# EAGLE board PokeRoyaleBetyPCB (EAGLE 8.6.3)
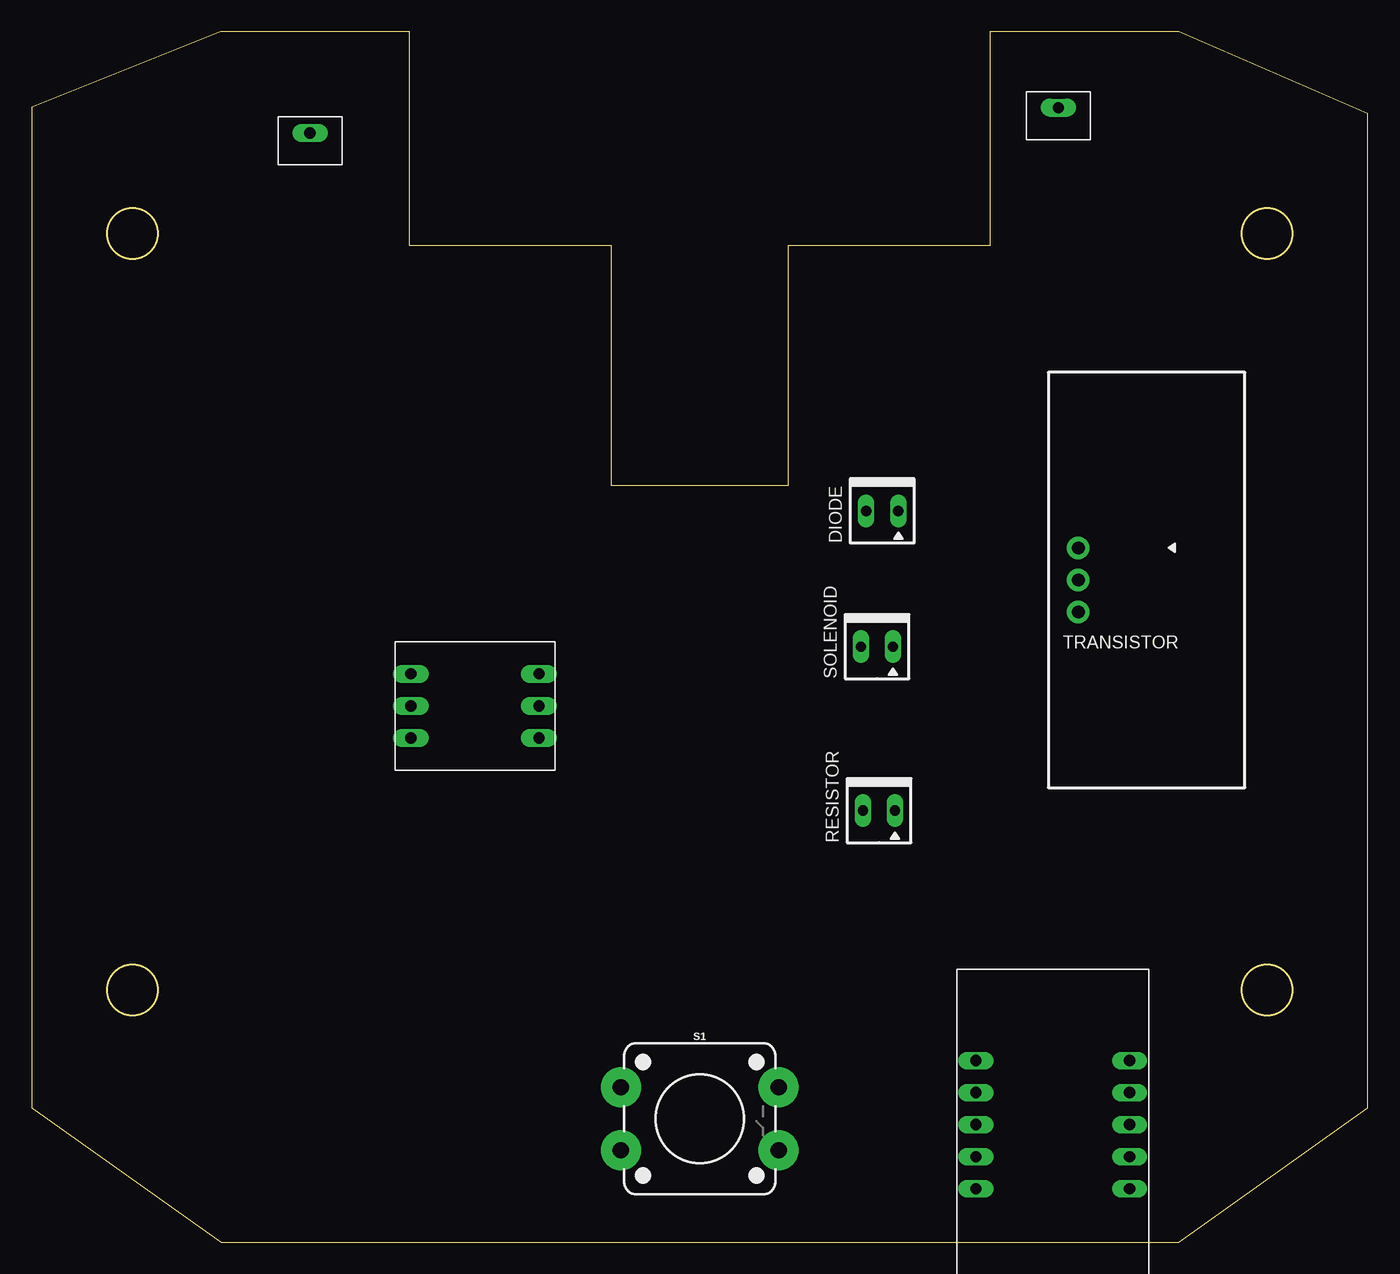
[diagram p0: board, top side]
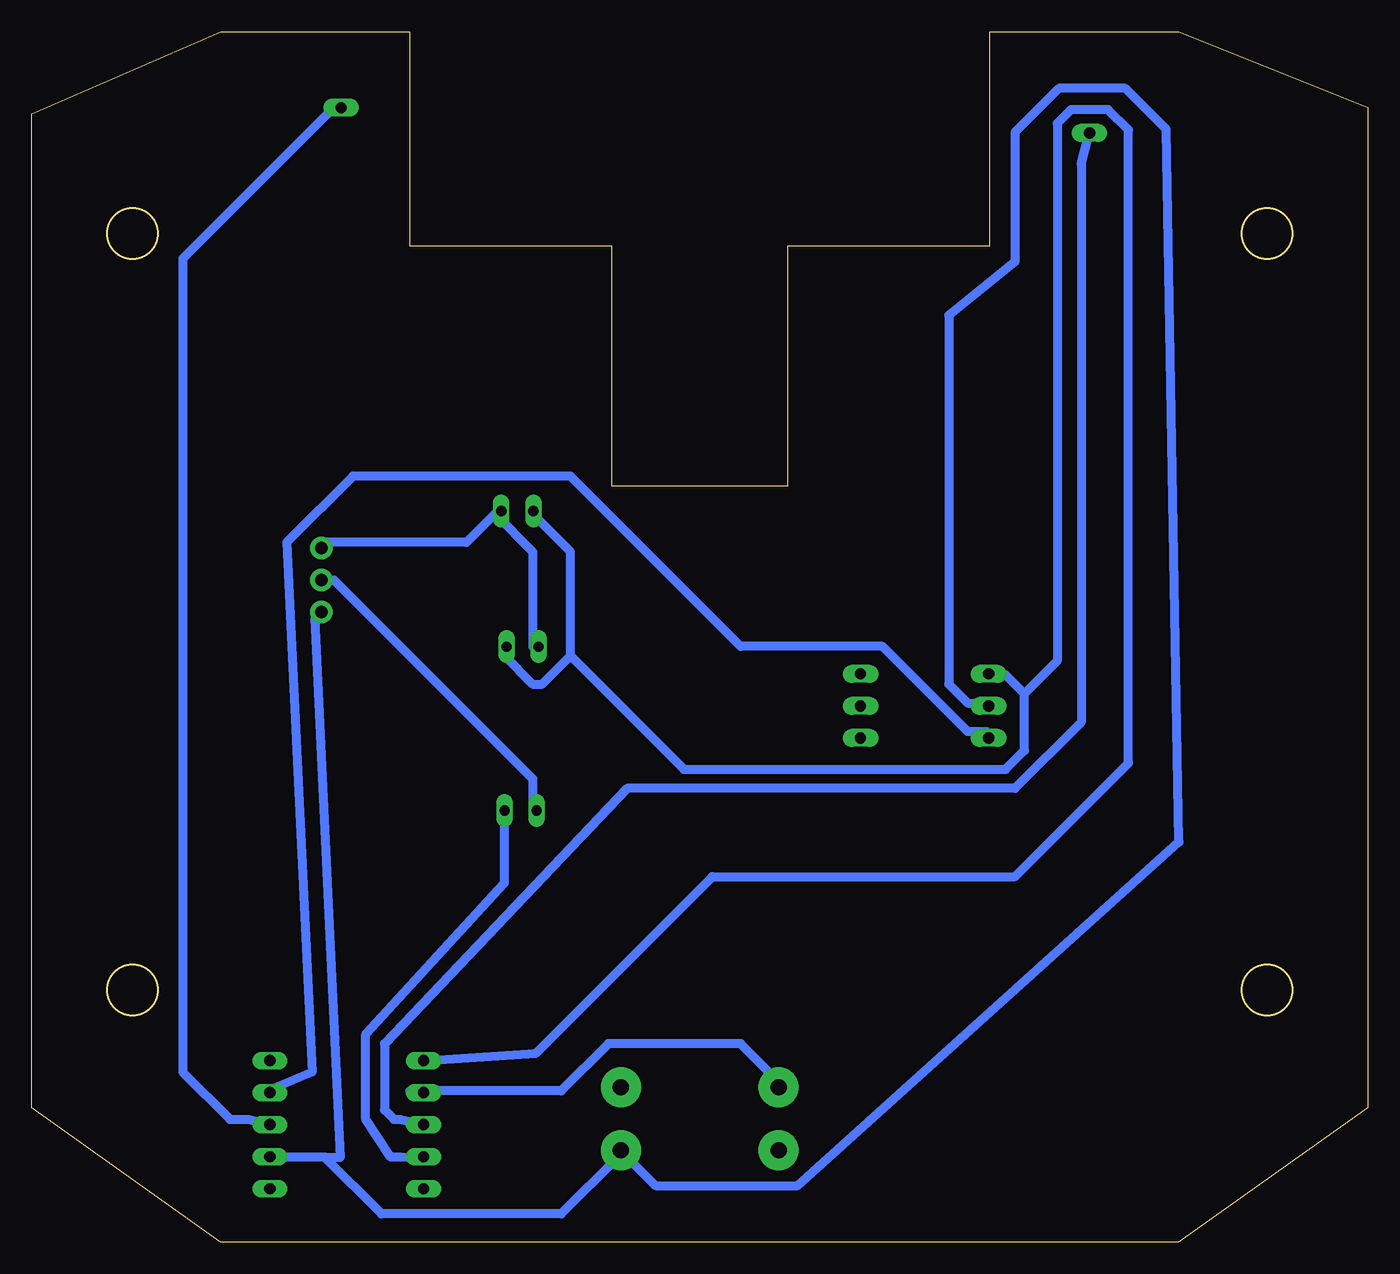
[diagram p1: board, bottom side, seen from below]

Size 106 x 96 mm. Coordinates in mm from the lower left corner, seen from the top.
Outline: 0,10.69 15.05,0 91,0 106,10.69 106,89.5 91,96 76,96 76,79 60,79 60,60 46,60 46,79 30,79 30,96 15,96 0,90 0,10.69
Outline: circle at 8,80 radius 2
Outline: circle at 8,20 radius 2
Outline: circle at 98,80 radius 2
Outline: circle at 98,20 radius 2
Copper layers (1*16): Top 0.035mm / dielectric 1.5mm / Bottom 0.035mm
Design rules "default *": minimum track width 0.7mm, minimum drill 0.8mm, track to track 0.8mm, track to pad 0.8mm, pad to pad 0.8mm, via to via 0.8mm, smd to smd 0.8mm, copper to edge 40mil, drill to drill 6mil, minimum pad ring 10mil, minimum via ring 8mil, stop-mask expansion 4mil, vias tented up to drill 0mil, thermal gap 10mil

## Footprints (pad centres in the part's own frame; a part is rotated, then mirrored left to right if it is on the bottom)
LCW-102-XX-X-S = drill 0.813 long: 1 1.27,0; 2 -1.27,0
TACTILE_SWITCH_PTH_12MM = drill 1.3 pad 3.175: 1 6.25,-2.5; 2 -6.25,-2.5; 3 6.25,2.5; 4 -6.25,2.5
LCW-103-XX-X-S = drill 1 pad 1.778: 1 2.54,5.415; 2 0,5.415; 3 -2.54,5.415
NEOPIXEL = drill 0.889 pad 1.422 long: + -3.81,2.54; +1 6.35,2.54; G -3.81,0; G1 6.35,0; IN -3.81,-2.54; O 6.35,-2.54
TRINKET = drill 0.889 long: 5V 6.096,-6.096; #0 6.096,1.524; #1 6.096,-1.016; #2 6.096,-3.556; #3 -6.096,-3.556; #4 -6.096,-1.016; BAT -6.096,4.064; GND -6.096,1.524; RST -6.096,-6.096; USB 6.096,4.064
COMMS = drill 0.9 long: P$1 0,0

## Placement (x,y rotation side)
DIODE  LCW-102-XX-X-S  [LCW-102-XX-X-S]  67.47,57.99 0 top
RESISTOR  LCW-102-XX-X-S  [LCW-102-XX-X-S]  67.22,34.23 0 top
S1  [TACTILE_SWITCH_PTH_12MM]  53,9.8 0 top
SOLENOID  LCW-102-XX-X-S  [LCW-102-XX-X-S]  67.06,47.23 0 top
TRANSISTOR  LCW-103-XX-X-S  [LCW-103-XX-X-S]  88.44,52.52 90 top
U$1  NEOPIXEL  [NEOPIXEL]  33.9,42.53 0 top
U$2  TRINKET  [TRINKET]  81,8.32 180 top
U$3  COMMS  [COMMS]  81.44,89.96 0 top
U$4  COMMS  [COMMS]  22.09,87.96 0 top

## Library data of the parts
DIODE RESISTOR SOLENOID TRANSISTOR = altered con-samtec
S1 = altered SparkFun-Switches
U$1-U$4 = adafruitComponents

## Nets
N$1: S1.4 U$2.#2
N$2: S1.1 TRANSISTOR.3 U$1.G U$2.GND
N$4: DIODE.1 SOLENOID.2 TRANSISTOR.1
N$5: U$1.IN U$2.#3
N$6: U$2.#4 U$3.P$1
N$7: U$2.#1 U$4.P$1
N$8: DIODE.2 SOLENOID.1 U$1.+ U$2.5V
N$9: RESISTOR.2 TRANSISTOR.2
N$10: RESISTOR.1 U$2.#0

## Tracks (layer width: path | path; a pad name or v marks a point on that pad's centre or on a via)
N$1
  Bottom 0.7: U$2.#2 76,12 64,12 60.25,15.75 49.75,15.75 46.75,12.75 S1.4
N$2
  Bottom 0.7: 82.75,6.75 81.5,6.75 83.5,49.5 TRANSISTOR.3 | 82.75,6.75 88,6.75 U$2.GND | 82.75,6.75 78.25,2.25 64,2.25 59.5,6.75 S1.1 58.75,6.75 56.5,4.5 45.25,4.5 15,31.75 16,88.25 19.25,91.5 24.5,91.5 28,88 28,77.75 33.25,73.5 33.25,44.25 31.75,42.75 30.25,42.75 U$1.G
N$4
  Bottom 0.7: 69.25,57.75 66.25,54.75 66.25,47.25 SOLENOID.2 | 69.25,57.75 71.5,55.5 82.75,55.5 TRANSISTOR.1 | 69.25,57.75 DIODE.1
N$5
  Bottom 0.7: U$2.#3 88,12 87.25,12 83.75,13.5 85.75,55.5 80.5,60.75 63.25,60.75 49.75,47.25 38.5,47.25 31.75,40.5 30.25,40.5 U$1.IN
N$6
  Bottom 0.7: U$2.#4 88.75,9.75 90.25,9.75 94,13.5 94,78 82,90 U$3.P$1
N$7
  Bottom 0.7: U$2.#1 76.75,9.75 77.25,9.75 78,10.5 78,15.75 58.75,36 28,36 22.75,41.25 22.75,85.5 U$4.P$1
N$8
  Bottom 0.7: 63.25,46.5 63.25,54.75 66.25,57.75 DIODE.2 | 63.25,46.5 65.5,44.25 66.25,44.25 68.5,46.5 SOLENOID.1 | 27.25,43.5 28.75,45 29.5,45 U$1.+ | 27.25,43.5 27.25,39 28.75,37.5 54.25,37.5 63.25,46.5 | U$2.5V 66,15 52,29 28,29 19,38 19,88.2 20.62,89.81 23.56,89.81 24.65,88.73 24.65,46.1 27.25,43.5
N$9
  Bottom 0.7: RESISTOR.2 66.25,34.5 66.25,36.75 82,52.5 82.75,52.5 TRANSISTOR.2
N$10
  Bottom 0.7: RESISTOR.1 68.5,33.75 68.5,28.5 79.5,16.5 79.5,9.75 77.5,6.75 76.75,6.75 U$2.#0